# Altium PCB ExtruderBreakoutB.PcbDoc
Units mil, origin at the board's own origin, x right, y up, seen from the top; angles counter-clockwise.
Board outline 920 x 1340 mil, 2 copper layers (Top Layer, Bottom Layer); 19 components, 18 nets, 58 pads, 3 vias.
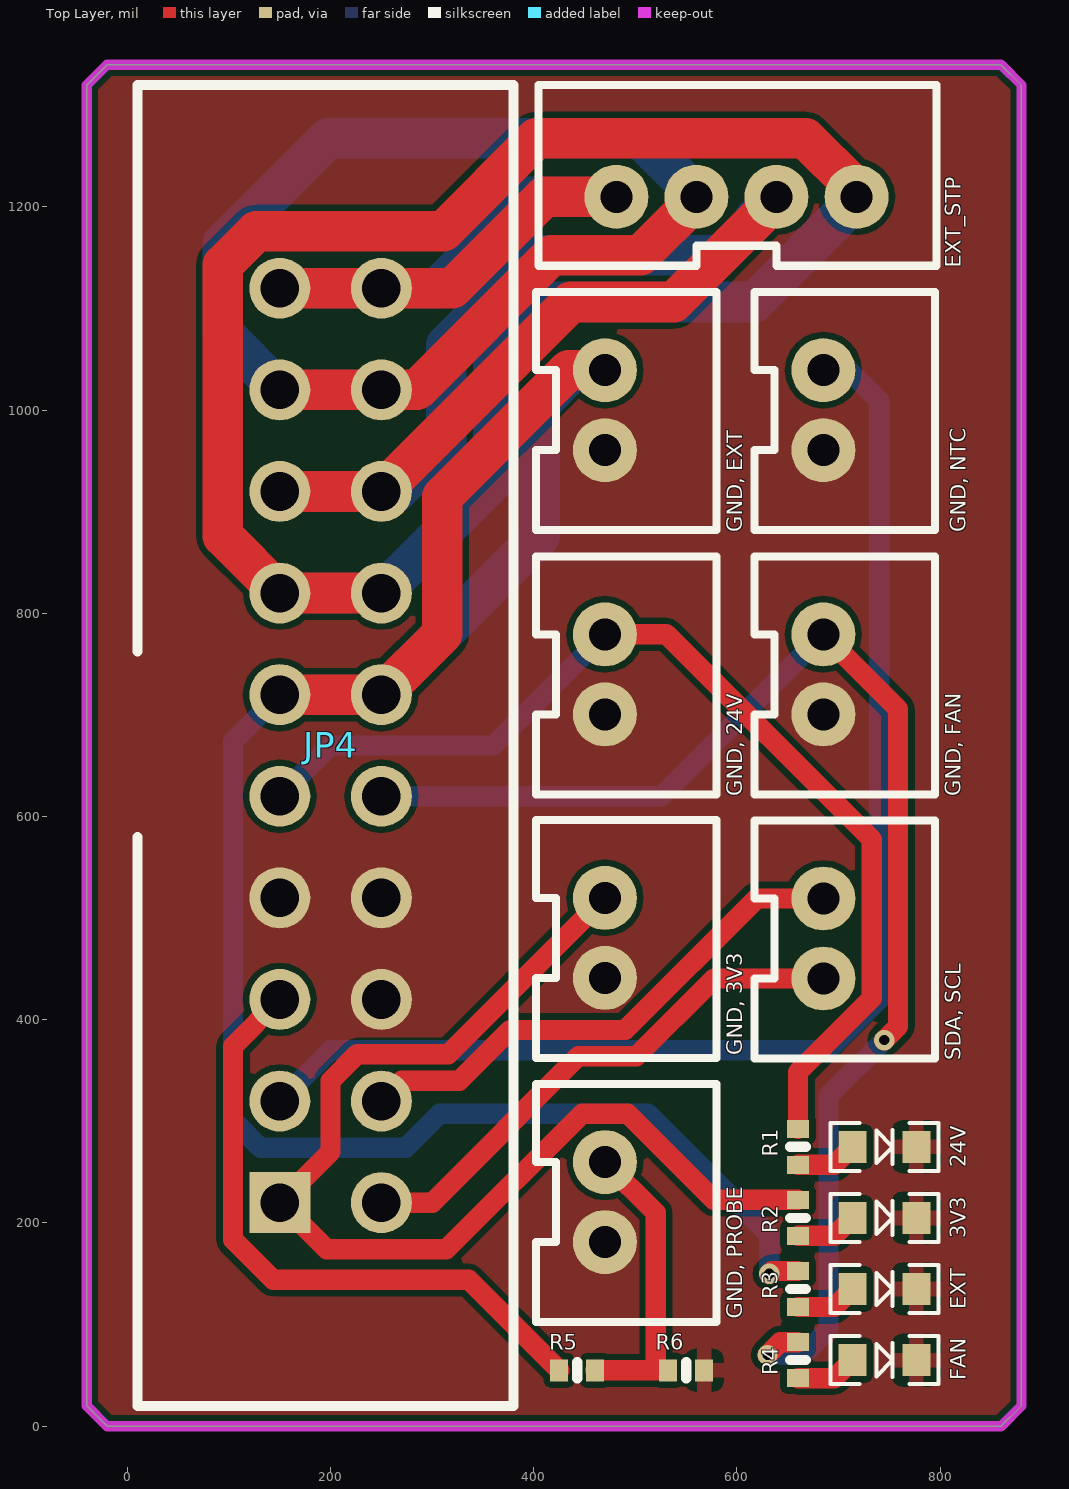
[diagram p0: Top Layer view]
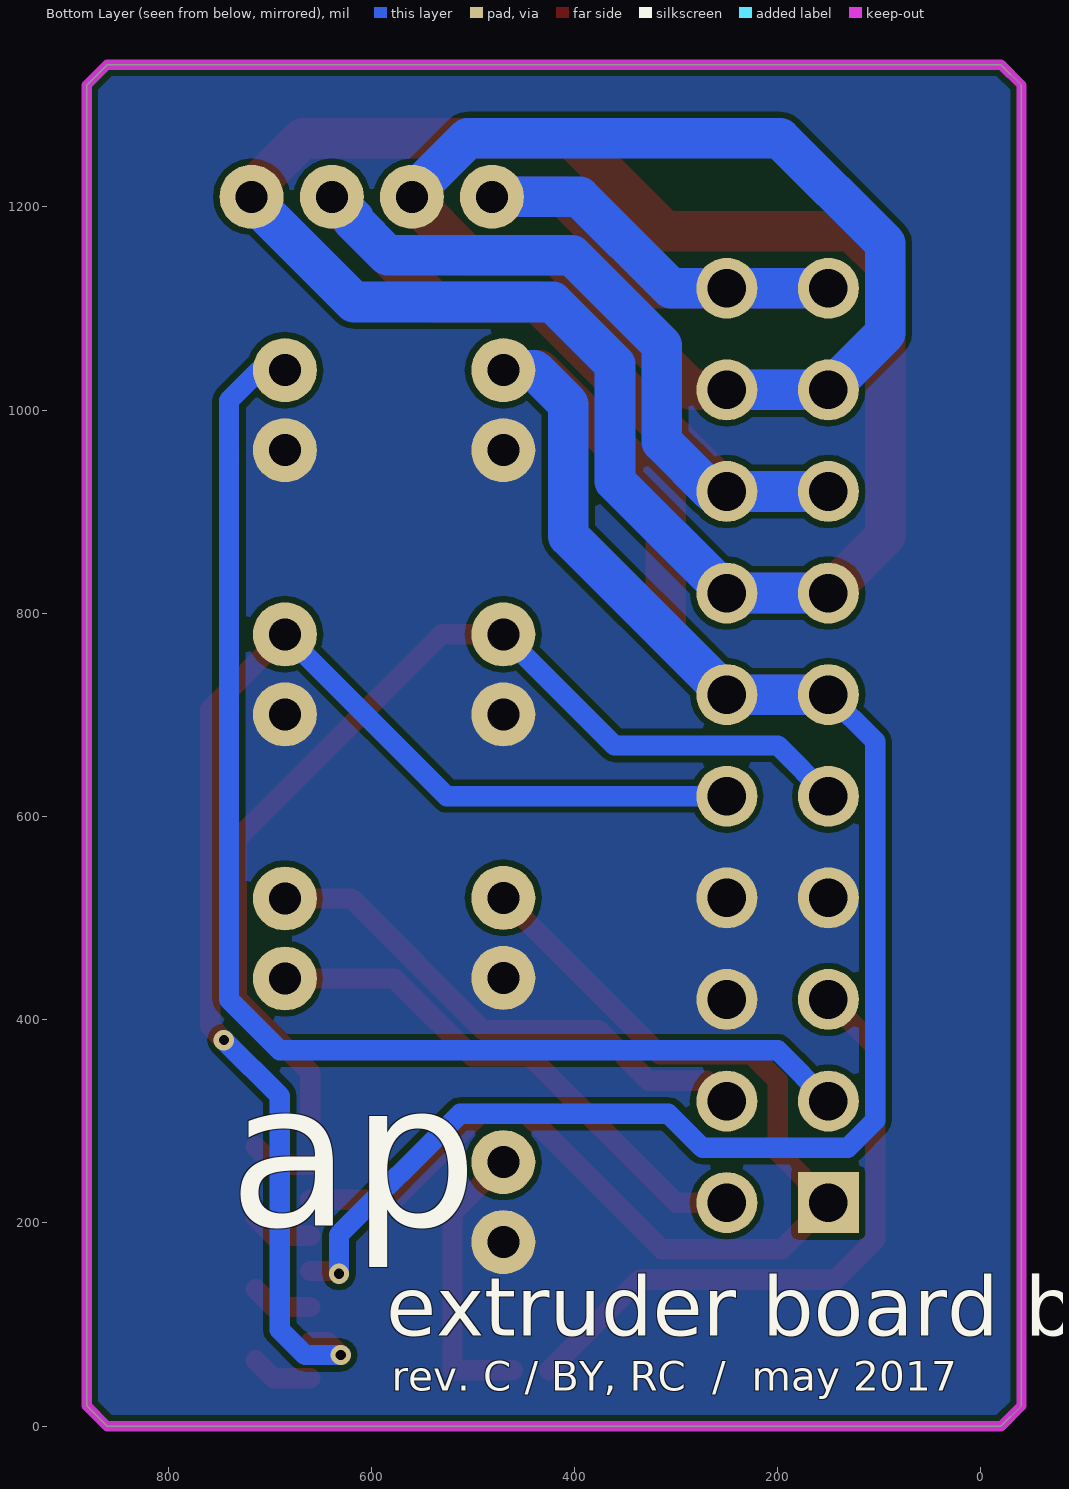
[diagram p1: Bottom Layer view, seen from below]
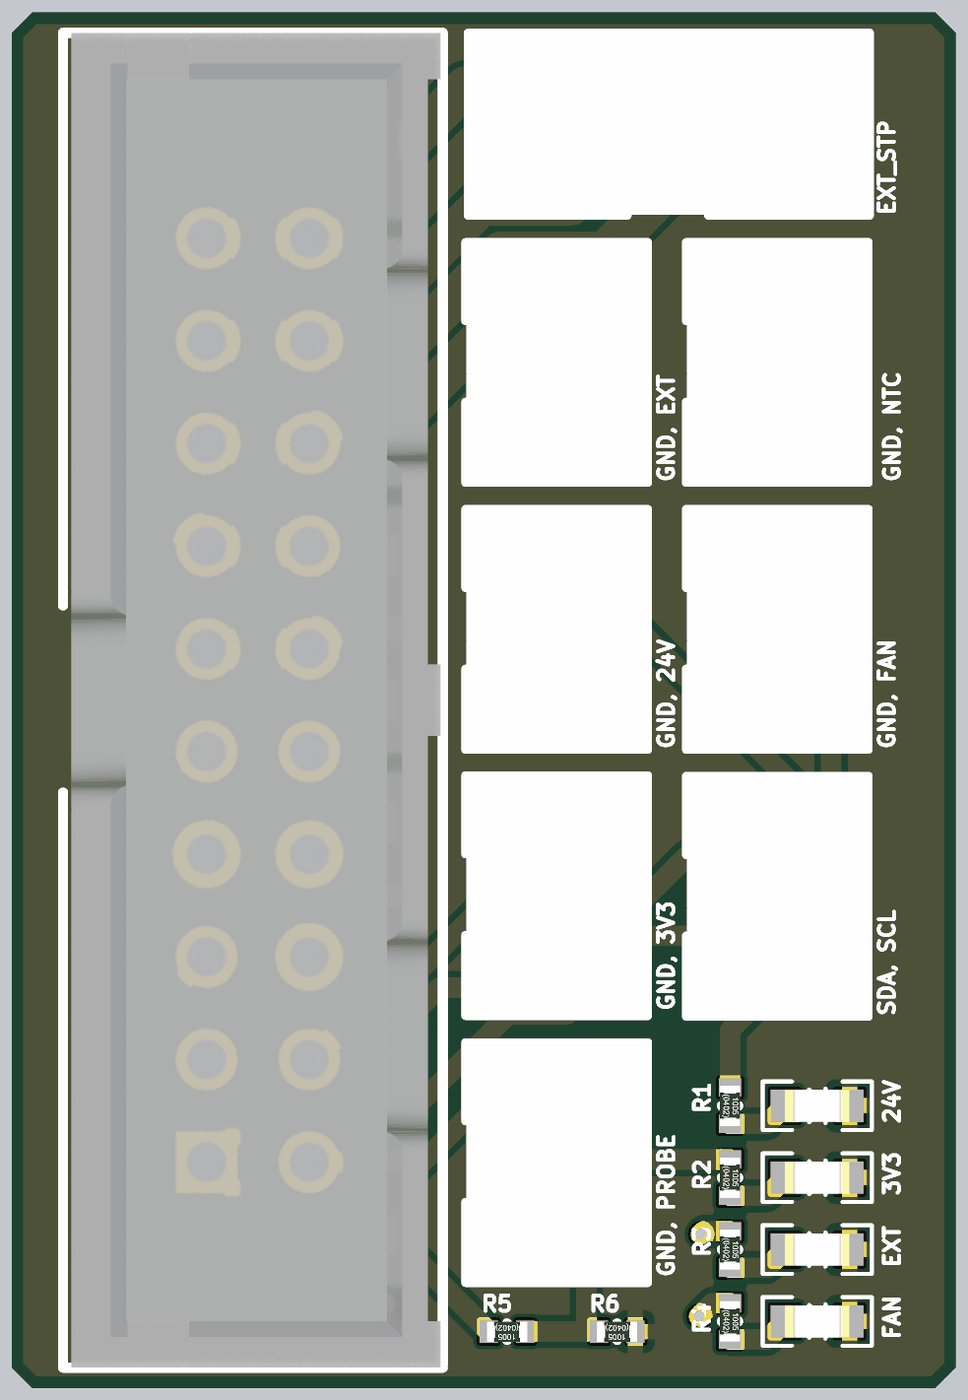
[diagram p2: 3D render of the assembled board from above, using the file's embedded part models]

## Layer stack, top to bottom
Top Solder: solder mask 0.4, Solder Resist, Dk 3.5
Top Layer: signal copper 1.4
Dielectric 1: dielectric 12.6, FR-4, Dk 4.8
Bottom Layer: signal copper 1.4
Bottom Solder: solder mask 0.4, Solder Resist, Dk 3.5

## Board outline
-40,20 -40,1320 -20,1340 860,1340 880,1320 880,20 860,0 -20,0

## Design rules (kind name [scope] priority, off if disabled: settings)
Clearance [All] p1: gap=6 ignorepadtopadclearanceinfootprint=FALSE except(0: Arc-Hole Track-Hole SMDPad-Hole THPad-Hole Via-Hole Fill-Hole Poly-Hole Region-Hole Text-Hole)
PolygonConnect ACCEL [HasFootprint('ADI-CC-14-1_V')] p1: connectstyle=Relief reliefconductorwidth=10 reliefentries=4 polygonreliefangle="90 Angle" airgapwidth=10
PolygonConnect CAP [HasFootprint('C0402[1005X55]')] p2: connectstyle=Relief reliefconductorwidth=15 reliefentries=4 polygonreliefangle="90 Angle" airgapwidth=10
PolygonConnect RES [HasFootprint('R0402[1005]')] p3: connectstyle=Relief reliefconductorwidth=15 reliefentries=4 polygonreliefangle="90 Angle" airgapwidth=10
PolygonConnect LED [HasFootprint('LED0603')] p4: connectstyle=Relief reliefconductorwidth=15 reliefentries=4 polygonreliefangle="90 Angle" airgapwidth=10
PolygonConnect [All] p5: connectstyle=Direct reliefconductorwidth=10 reliefentries=4 polygonreliefangle="90 Angle" airgapwidth=10
RoutingVias [All] p1: holewidth=10 width=20 viastyle="Through Hole" minholewidth=10 minwidth=20 maxholewidth=10 maxwidth=20
SolderMaskExpansion SolderMaskVia [IsVia] p1: expansion=1 soldermaskfromhole=TRUE
SolderMaskExpansion [All] p2: expansion=3
Width [All] p1: maxlimit=100 minlimit=10 preferedwidth=20
30 further rules are at their usual default settings.

## Components (designator, comment, footprint, x,y, rotation, side; value= is the part's Value field where it differs from the comment)
3V3 "LED_0603_BLUE_5mA" LED0603 745,205 r0 top
24V "LED_0603_GREEN_5mA" LED0603 745,275 r0 top
EXT "LED_0603_ORANGE_5mA" LED0603 745,135 r0 top
EXT_STP "JST_PH_4_VERT" JST-PH-4-PTH-VERT 599.37,1210 r0 top
FAN "LED_0603_ORANGE_5mA" LED0603 745,65 r0 top
"GND, 3V3" "JST_PH_2_VERT" JST-PH-2-PTH-VERT 470,480.63 r270 top (schematic designator 3V3)
"GND, 24V" "JST_PH_2_VERT" JST-PH-2-PTH-VERT 470,740 r270 top (schematic designator 24V)
"GND, EXT" "JST_PH_2_VERT" JST-PH-2-PTH-VERT 470,1000 r270 top (schematic designator EXT)
"GND, FAN" "JST_PH_2_VERT" JST-PH-2-PTH-VERT 685,740 r270 top (schematic designator FAN)
"GND, NTC" "JST_PH_2_VERT" JST-PH-2-PTH-VERT 685,1000 r270 top (schematic designator NTC)
"GND, PROBE" "JST_PH_2_VERT" JST-PH-2-PTH-VERT 470,220.63 r270 top (schematic designator PROBE)
JP4 "EXTRUDER_OUT" IDC20 150,220 r90 top
R1 "2K2 1% 0402" R0402[1005] 660,275 r270 top value=2K2
R2 "2K2 1% 0402" R0402[1005] 660,205 r270 top value=2K2
R3 "2K2 1% 0402" R0402[1005] 660,135 r270 top value=2K2
R4 "2K2 1% 0402" R0402[1005] 660,65 r270 top value=2K2
R5 "15K 1% 0402" R0402[1005] 442.72,55 r180 top value=15K
R6 "2K2 1% 0402" R0402[1005] 550,55 r180 top value=2K2
"SDA, SCL" "JST_PH_2_VERT" JST-PH-2-PTH-VERT 685,480 r270 top (schematic designator I2C)

## Footprints (in the part's own frame and the unit in brackets; to place one, negate y for a bottom-side part, rotate by r counter-clockwise, add the part's x,y. Pads: shape width x height; smd on the part's side, far side on the other; paste and mask are expansions set on the pad)
IDC20 [mil] "Stackable 10 pin header"
  rect 60x60 hole 38: 1(0,0)
  round 60 hole 38: 2(100,0) 3(200,0) 4(300,0) 5(400,0) 6(500,0) 7(600,0) 8(700,0) 9(800,0) 10(900,0) 11(0,-100) 12(100,-100) 13(200,-100) 14(300,-100) 15(400,-100) 16(500,-100) 17(600,-100) 18(700,-100) 19(800,-100) 20(900,-100)
  silkscreen extent -200,-230 1100,140, body extent -200,-228 1100,132, height 390
JST-PH-2-PTH-VERT [mil]
  round 63 hole 31.5: 1(-39.37,0) 2(39.37,0)
  silkscreen extent -116,-68 118,110, body extent -116,-67 116,110, height 236
JST-PH-4-PTH-VERT [mil]
  round 63 hole 31.5: 1(-118.11,0) 2(-39.37,0) 3(39.37,0) 4(118.37,0)
  silkscreen extent -195,-68 197,110, body extent -195,-67 195,110, height 236
LED0603 [mm]
  rect 0.7x0.8 smd: A(-0.8,0) C(0.8,0)
  silkscreen extent -1.35,-0.6 1.35,0.6, body extent -0.8,-0.4 0.8,0.4, height 0.75
R0402[1005] [mm] "Chip Resistor, Body 1.0x0.5mm"
  rect 0.45x0.55 smd: 1(-0.45,0) 2(0.45,0)
  silkscreen extent 0,-0.2 0,0.2, body extent -0.5,-0.25 0.5,0.25, height 0.35

## Part data
3V3: Manufacturer="Lite-On Inc.", PartNumber=LTST-C193TBKT-5A, Mounting Technology="Surface Mount", PackageDescription="0603 (1608 Metric)", PackageReference=0603
24V: Manufacturer="Lite-On Inc.", PartNumber=LTST-C193TGKT-5A, Mounting Technology="Surface Mount", PackageDescription="0603 (1608 Metric)", PackageReference=0603
EXT FAN: Manufacturer="Lite-On Inc.", PartNumber=LTST-C193KFKT-5A, Mounting Technology="Surface Mount", PackageDescription="0603 (1608 Metric)", PackageReference=0603
EXT_STP: Manufacturer="JST Sales America Inc.", PartNumber=B4B-PH-K-S(LF)(SN), Mounting Technology="Through Hole", PackageReference=JST-PH
"GND, 3V3" "GND, 24V" "GND, EXT" "GND, FAN" "GND, NTC" "GND, PROBE" "SDA, SCL": Manufacturer="JST Sales America, Inc.", PartNumber=B2B-PH-K-S(LF)(SN), Mounting Technology="Through Hole", PackageReference=JST-PH
JP4: library part IDC20, Supplier Part Number 1=A97487-ND, Supplier 1=Digi-Key
R1 R2 R3 R4 R6: library part RES_2K2_0402_1%, "2K2 0.063W 1% 0402 (1005 Metric)", Manufacturer="KOA Speer", PartNumber=RK73H1ETTP2201F, Power=0.063W, Tolerance=1%, ComponentLink1Description=Datasheet, ComponentLink1URL=http://www.koaspeer.com/catimages/Products/RK73H/RK73H.pdf, Mounting Technology="Surface Mount", PackageDescription="0402 (1005 Metric)", PackageReference=0402
R5: library part RES_15K_0402_1%, "15K 0.063W 1% 0402 (1005 Metric)", Manufacturer="KOA Speer", PartNumber=RK73H1ETTP1502F, Power=0.063W, Tolerance=1%, ComponentLink1Description=Datasheet, ComponentLink1URL=http://www.koaspeer.com/catimages/Products/RK73H/RK73H.pdf, Mounting Technology="Surface Mount", PackageDescription="0402 (1005 Metric)", PackageReference=0402

## Via types
v1: diameter 20, hole 10, Top Layer to Bottom Layer, 3 vias

## Nets (pads, with @x,y where several pads share a name; then routed paths per layer and width w, separated by ;. In a path a pad name is that pad's centre, name@x,y a point inside that pad or via, vN(x,y) a via of type N, cw(c..) or ccw(c..) an arc to the next point about the centre after c; other vN are vias at no path point)
3V3: "GND, 3V3.1" JP4.1 R2.1 | length 1104.7
  Top Layer w20: 470,520 316,366 226,366 200,340 200,270 JP4.1 196,174 314,174 447.5,307.5 492.5,307.5 577.28,222.72 R2.1
24V: "GND, 24V.1" JP4.5 R1.1 | length 1046.9
  Top Layer w20: 470,779.37 530.63,779.37 732.5,577.5 732.5,420.95 660,348.45 R1.1
  Bottom Layer w20: JP4.5 200,670 360.63,670 470,779.37
EXTRUDER_1A: EXT_STP.4 JP4.7 JP4.17 | length 1939.6
  Top Layer w40: JP4.17 JP4.7 94,876 94,1143.2 126.8,1176 310.84,1176 402.34,1267.5 667.5,1267.5 EXT_STP.4@715,1220 ; EXT_STP.4@715,1210 EXT_STP.4
  Bottom Layer w40: JP4.7 JP4.17 360,930 360,1045 421.5,1106.5 617.01,1106.5 717.74,1207.23 EXT_STP.4
EXTRUDER_1B: EXT_STP.3 JP4.8 JP4.18 | length 1258.8
  Top Layer w40: JP4.8 JP4.18 436.5,1106.5 537.82,1106.5 EXT_STP.3@628.12,1196.8
  Bottom Layer w40: JP4.8 JP4.18 265,920 314,969 314,1064.05 402.45,1152.5 583.82,1152.5 617.5,1186.18 617.5,1188.76 EXT_STP.3
EXTRUDER_2A: EXT_STP.2 JP4.9 JP4.19 | length 1292.7
  Top Layer w40: JP4.9 JP4.19 284.95,1020 417.45,1152.5 505.08,1152.5 560,1207.42 EXT_STP.2
  Bottom Layer w40: JP4.19 JP4.9 94,1076 94,1164 197.5,1267.5 505.08,1267.5 561.29,1211.29 EXT_STP.2
EXTRUDER_2B: EXT_STP.1 JP4.10 JP4.20 | length 737.1
  Top Layer w40: JP4.10 JP4.20 319.89,1120 409.89,1210 EXT_STP.1
  Bottom Layer w40: JP4.10 JP4.20 304.89,1120 394.89,1210 EXT_STP.1
FAN: "GND, FAN.1" JP4.15 R4.1 | length 1360.9
  Top Layer w20: v1(630,70) 642.72,82.72 R4.1 ; 685,779.37 758.5,705.87 758.5,393.5 v1(745,380)
  Bottom Layer w20: JP4.15 525.63,620 685,779.37 692.82,787.18 ; v1(630,70) 665,70 690,95 690,325 v1(745,380)
GND: 3V3.C 24V.C "GND, 3V3.2" "GND, 24V.2" "GND, EXT.2" "GND, FAN.2" "GND, NTC.2" "GND, PROBE.2" EXT.C FAN.C JP4.4 JP4.13 JP4.14 R6.1
HEATER: "GND, EXT.1" JP4.6 JP4.16 R3.1 | length 2167.7
  Top Layer w20: v1(631.77,150) 634.49,152.72 R3.1
  Top Layer w40: JP4.6 JP4.16 310,780 310,914.95 434.42,1039.37 470,1039.37
  Bottom Layer w20: JP4.6 104,674 104,300.95 130.95,274 274,274 307.5,307.5 512.5,307.5 631.77,188.23 v1(631.77,150)
  Bottom Layer w40: JP4.6 JP4.16 406,876 406,1006 439.37,1039.37 470,1039.37
Net3V3_A: 3V3.A R2.2 | length 60.8
  Top Layer w20: R2.2 695.79,187.28 3V3.A
Net24V_A: 24V.A R1.2 | length 60.8
  Top Layer w20: R1.2 695.79,257.28 24V.A
NetEXT_A: EXT.A R3.2 | length 60.8
  Top Layer w20: R3.2 695.79,117.28 EXT.A
NetFAN_A: FAN.A R4.2 | length 60.8
  Top Layer w20: R4.2 695.79,47.28 FAN.A
NTC_EXT: "GND, NTC.1" JP4.2 | length 1263.2
  Bottom Layer w20: JP4.2 200,370 690,370 740,420 740,1009.37 710,1039.37
PROBE_IN: JP4.3 R5.2 | length 629.9
  Top Layer w20: JP4.3 104,374 104,183.37 143.37,144 336,144 R5.2
PROBE_OUT: "GND, PROBE.1" R5.1 R6.2 | length 285.3
  Top Layer w20: R5.1 520,55 520,210 470,260
SCL: "SDA, SCL.1" JP4.12 | length 517.6
  Top Layer w20: JP4.12 270,340 326.77,340 376.77,390 490,390 619.37,519.37 685,519.37
SDA: "SDA, SCL.2" JP4.11 | length 526.4
  Top Layer w20: JP4.11 300,220 444,364 500.77,364 577.4,440.63 685,440.63

## Polygon pours and split planes (outlines as drawn)
GND on Top Layer "Top Layer-No Net" (solid, remove dead copper, pour order 2): -90,1390 -85,1395 1180,1395 1230,1345 1230,-25 1075,-180 390,-180 35,-180 -155,10
GND on Bottom Layer "Top Layer-No Net" (solid, remove dead copper, pour order 4): -100,-145 955,-145 1265,165 1200,230 1200,1295 1060,1435 680,1435 80,1435 -205,1150

## Keep-outs
Keep-Out Layer:
  the board outline again, w10

## Silkscreen, mask and mechanical layers (free items; w line width, h text height)
Bottom Overlay:
  text "ap" at 740,140 h300
  text "extruder board b" at 585,70 h100
  text "rev. C / BY, RC  /  may 2017" at 580,25 h50